# Altium PCB OCP_V1.0.PcbDoc
Units mil, origin at the board's own origin, x right, y up, seen from the top; angles counter-clockwise.
Board outline 1900 x 1460 mil, 2 copper layers (Top Layer, Bottom Layer); 37 components, 20 nets, 119 pads, 81 vias.
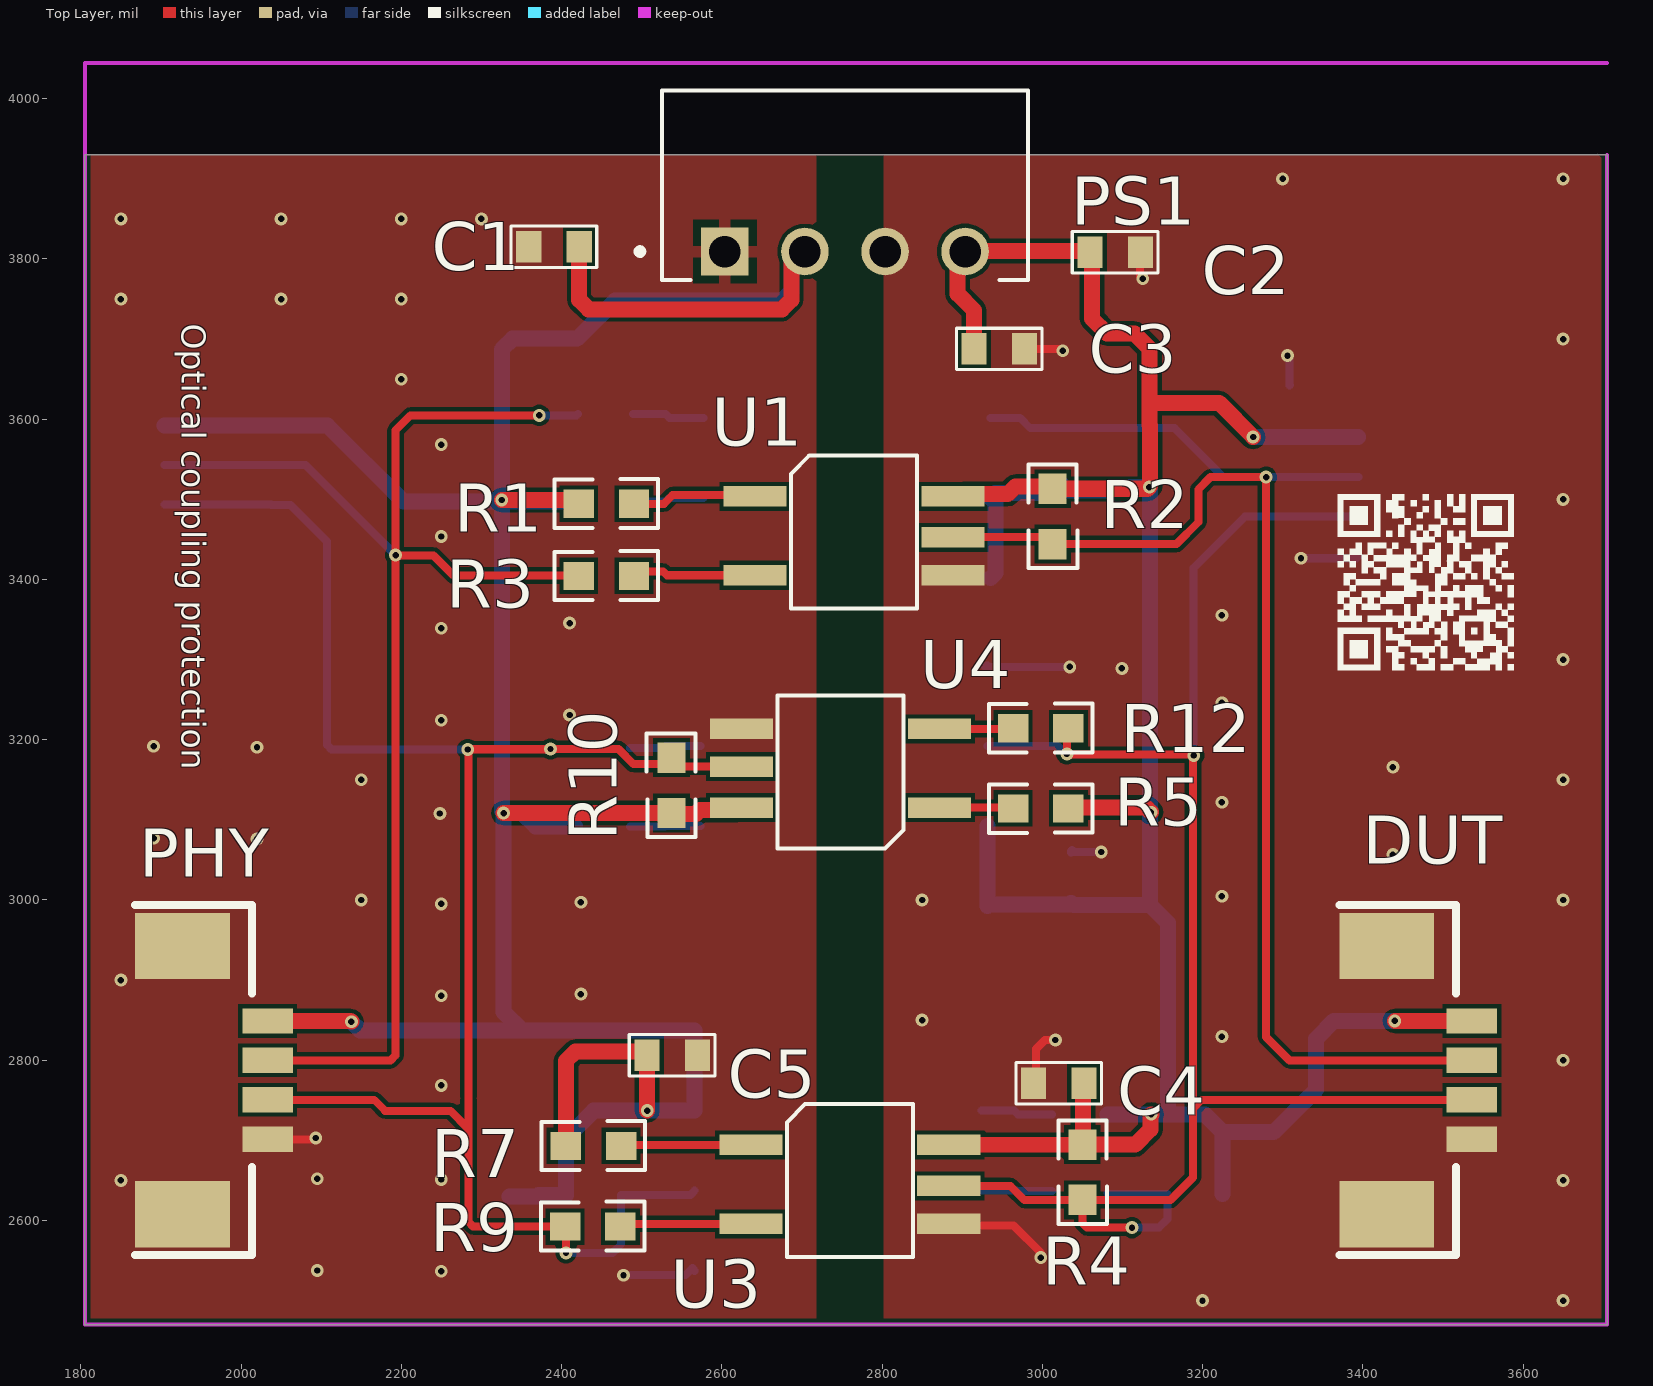
[diagram p0: Top Layer view]
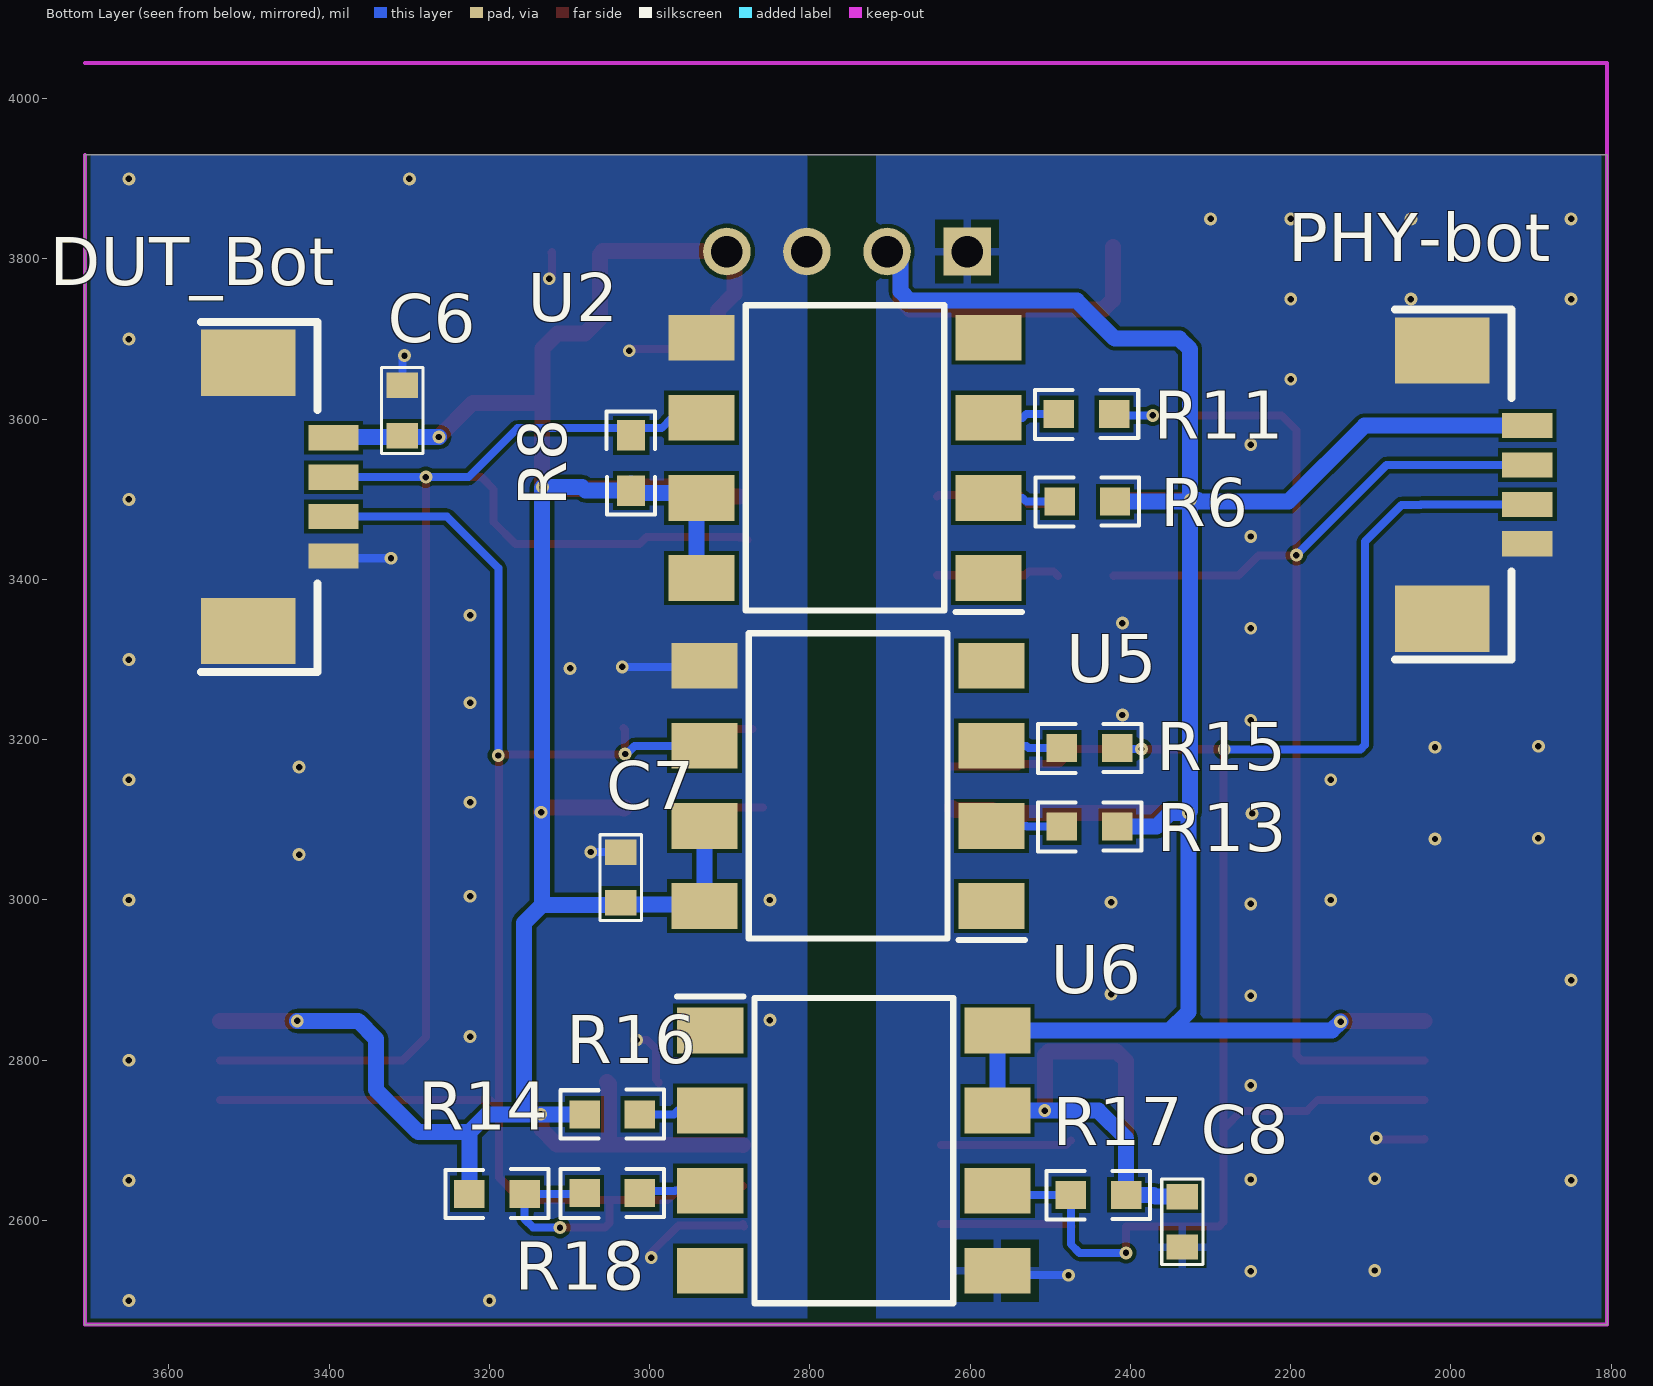
[diagram p1: Bottom Layer view, seen from below]
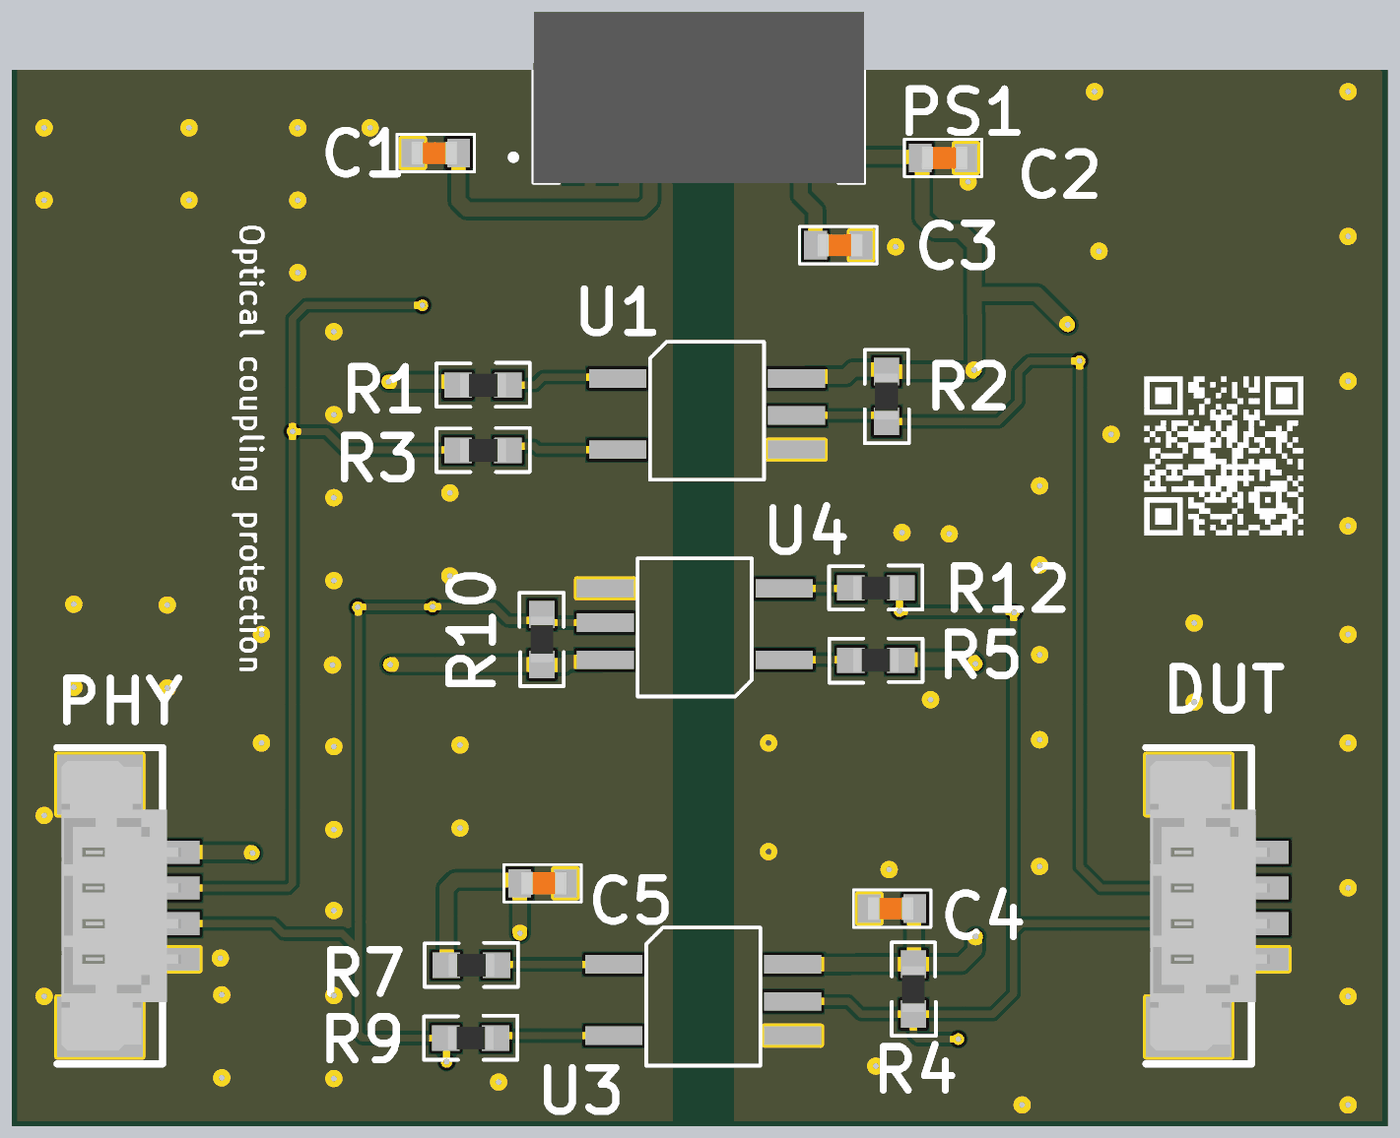
[diagram p2: 3D render of the assembled board from above, using the file's embedded part models]
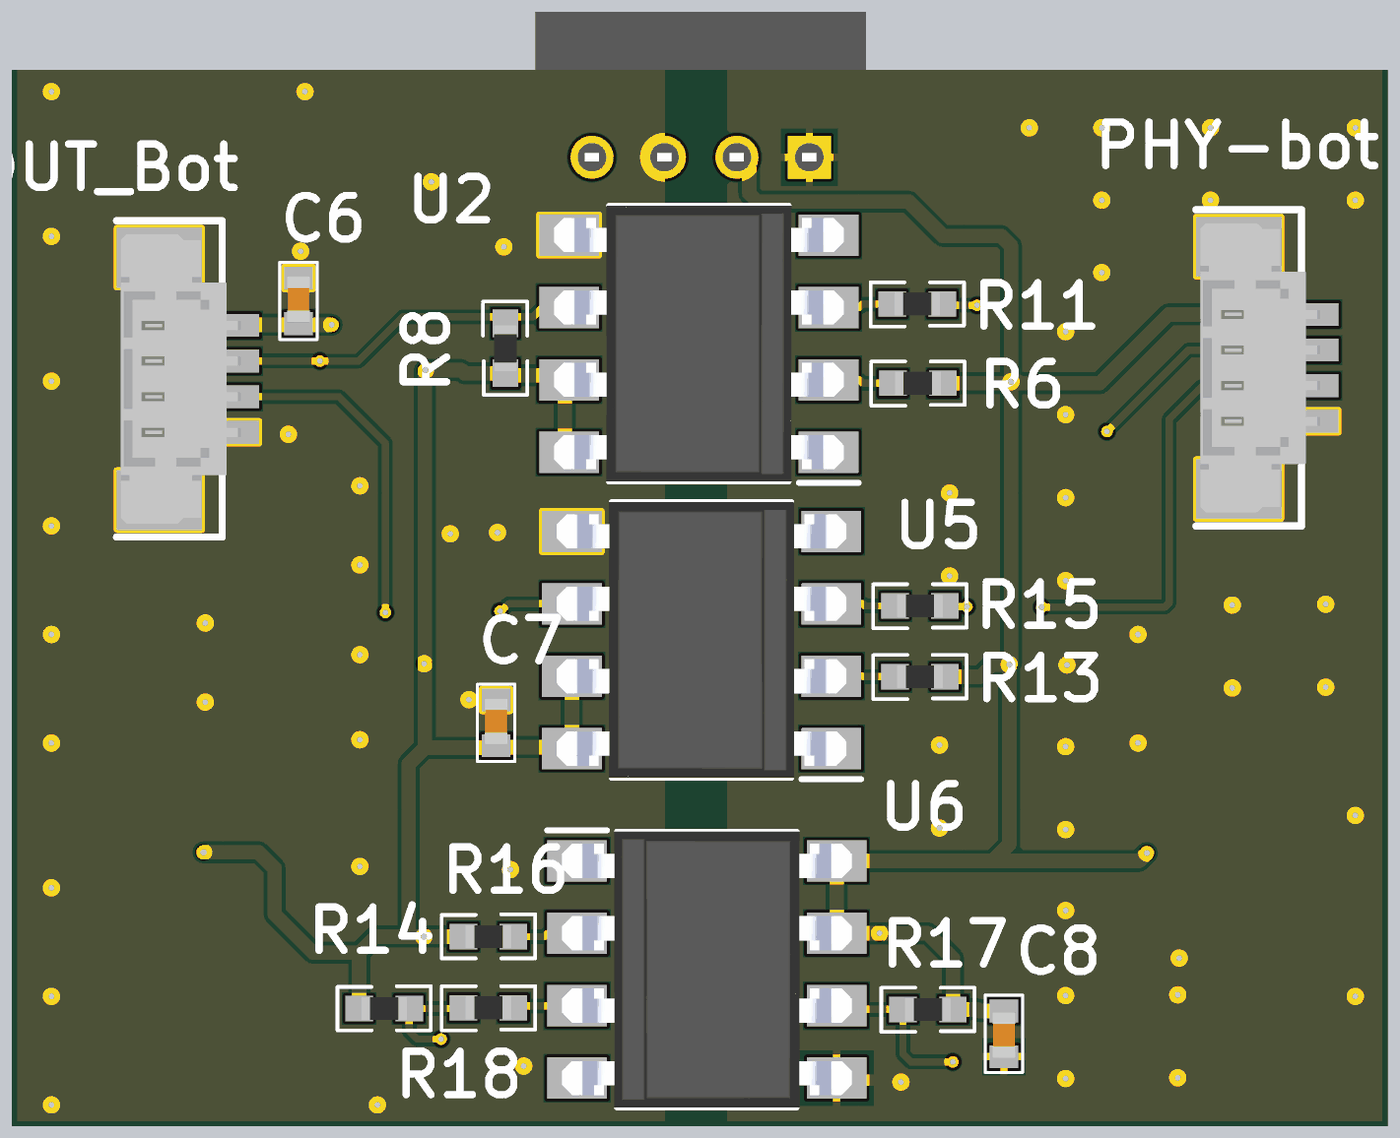
[diagram p3: 3D render of the assembled board from below, using the file's embedded part models]

## Layer stack, top to bottom
Top Solder: solder mask 0.4, Solder Resist, Dk 3.5
Top Layer: signal copper 1.4
Dielectric 1: dielectric 12.6, FR-4, Dk 4.8
Bottom Layer: signal copper 1.4
Bottom Solder: solder mask 0.4, Solder Resist, Dk 3.5

## Board outline
1805,2470 1805,3930 3705,3930 3705,2470

## Design rules (kind name [scope] priority, off if disabled: settings)
Clearance [All] p1: gap=5 ignorepadtopadclearanceinfootprint=FALSE
PlaneConnect [All] p1: planeconnectstyle=Direct reliefexpansion=20 reliefentries=4 reliefconductorwidth=10 reliefairgap=10
PolygonConnect [All] p1: connectstyle=Relief reliefconductorwidth=10 reliefentries=4 polygonreliefangle="90 Angle" airgapwidth=10
RoutingVias [All] p1: holewidth=28 width=50 viastyle="Through Hole" minholewidth=8 minwidth=16 maxholewidth=28 maxwidth=50
SolderMaskExpansion [All] p1: expansion=4 istentingtop=FALSE
SupplyNets "Schematic Supply Nets_3" [InNet('GND_out')] p1: voltage=0.000
SupplyNets "Schematic Supply Nets_2" [InNet('5V_in')] p2: voltage=0.000
SupplyNets "Schematic Supply Nets_1" [InNet('5V_out')] p3: voltage=0.000
SupplyNets "Schematic Supply Nets" [InNet('GND_in')] p4: voltage=0.000
UnRoutedNet [All] p1: checkbadconnections=TRUE
Width [All] p1: maxlimit=20 minlimit=5 preferedwidth=10
28 further rules are at their usual default settings.

## Components (designator, comment, footprint, x,y, rotation, side; value= is the part's Value field where it differs from the comment)
C1 "0.1uF/50V/C0603" C0603 2358.94,3815.17 r0 top value=10uF/50V/C0603
C2 "0.1uF/50V/C0603" C0603 3122.49,3808.36 r180 top value=10uF/50V/C0603
C3 "0.1uF/50V/C0603" C0603 2977.84,3687.74 r180 top
C4 "0.1uF/50V/C0603" C0603 2989,2771.3 r0 top
C5 "0.1uF/50V/C0603" C0603 2569.51,2806.24 r180 top
C6 "0.1uF/50V/C0603" C0603 3308.95,3642.47 r270 bottom
C7 "0.1uF/50V/C0603" C0603 3036.08,3059.47 r270 bottom
C8 "0.1uF/50V/C0603" C0603 2335.15,2566.7 r90 bottom
DUT "CCX-W125-04-SMT" CON1.25MM_4PIN(180) 3483.15,2775.19 r270 top
DUT_Bot "CCX-W125-04-SMT" CON1.25MM_4PIN(180) 3447.83,3503.1 r270 bottom
PHY "CCX-W125-04-SMT" CON1.25MM_4PIN(180) 1980,2775.19 r270 top
PHY-bot "CCX-W125-04-SMT" CON1.25MM_4PIN(180) 1957.72,3518.35 r270 bottom
PS1 "B0505S-1WR3" CONV_B0505S-1WR3 2753.72,3892 r0 top
R1 "3.3K/1%/R0603" R0603 2455.97,3494.49 r180 top
R2 "3.3K/1%/R0603" R0603 3012.8,3478.68 r90 top
R3 "3.3K/1%/R0603" R0603 2455.97,3404.49 r180 top value=100/1%/R0603
R4 "3.3K/1%/R0603" R0603 3050,2660 r90 top
R5 "3.3K/1%/R0603" R0603 2998.11,3114.33 r0 top
R6 "3.3K/1%/R0603" R0603 2453.83,3497.06 r180 bottom
R7 "3.3K/1%/R0603" R0603 2439.78,2693.07 r180 top
R8 "3.3K/1%/R0603" R0603 3023.18,3545.4 r270 bottom
R9 "3.3K/1%/R0603" R0603 2438.89,2592.39 r180 top value=100/1%/R0603
R10 "3.3K/1%/R0603" R0603 2537.2,3143.11 r270 top value=4.7K/1%/R0603
R11 "3.3K/1%/R0603" R0603 2454.79,3606.54 r180 bottom value=100/1%/R0603
R12 "3.3K/1%/R0603" R0603 2998.11,3214.33 r180 top value=100/1%/R0603
R13 "3.3K/1%/R0603" R0603 2451.02,3091.67 r180 bottom
R14 "3.3K/1%/R0603" R0603 3190.62,2633.11 r0 bottom
R15 "3.3K/1%/R0603" R0603 2451.02,3189.45 r180 bottom value=100/1%/R0603
R16 "3.3K/1%/R0603" R0603 3046.62,2732.49 r0 bottom
R17 "3.3K/1%/R0603" R0603 2440,2631.94 r180 bottom value=4.7K/1%/R0603
R18 "3.3K/1%/R0603" R0603 3046.72,2634.11 r180 bottom value=100/1%/R0603
U1 "HCPL-M601" JEDEC_MO-155 2764.94,3454.49 r0 top
U2 "6N137S-TA1" SOP254P1016X460-8N 2756.21,3551.81 r0 bottom
U3 "HCPL-M601" JEDEC_MO-155 2759.87,2645 r0 top
U4 "HCPL-M601" JEDEC_MO-155 2748.11,3164.33 r180 top
U5 "6N137S-TA1" SOP254P1016X460-8N 2752.44,3142.36 r0 bottom
U6 "6N137S-TA1" SOP254P1016X460-8N 2745.2,2687.12 r180 bottom

## Footprints (in the part's own frame and the unit in brackets; to place one, negate y for a bottom-side part, rotate by r counter-clockwise, add the part's x,y. Pads: shape width x height; smd on the part's side, far side on the other; paste and mask are expansions set on the pad)
C0603 [mm]
  rect 0.8x1 smd: 1(0,0) 2(1.6,0)
  silkscreen extent -0.56,-0.66 2.16,0.66, body extent -0.05,-0.4 1.55,0.4, height 0.5
CON1.25MM_4PIN(180) [mm]
  rect 2.1x3 smd: 0(-4.25,-1.35) 0(4.25,-1.35)
  rect 0.8x1.6 smd: 1(-1.875,1.35) 2(-0.625,1.35) 3(0.625,1.35) 4(1.875,1.35)
  silkscreen extent -5.55,-2.85 5.55,0.85, body extent -5.07,-2.7 5.07,1.5, height 4.67
CONV_B0505S-1WR3 [mm]
  rect 1.508x1.508 / inner round 1.508 / far side rect 1.508x1.508 hole 1: 1(-3.81,-2.1)
  round 1.508 hole 1: 2(-1.27,-2.1) 3(1.27,-2.1) 4(3.81,-2.1)
  silkscreen extent -6.6,-3 5.8,3, body extent -5.8,-3 5.8,3, height 10.16
JEDEC_MO-155 [mm]
  rect 2x0.65 smd: 1(-3.135,1.25) 3(-3.135,-1.25) 4(3.135,-1.25) 5(3.135,-0.05) 6(3.135,1.25)
  silkscreen extent -2,-2.31 2,2.54
R0603 [mil]
  rect 38x35 smd: 1(-34.45,0) 2(34.55,0)
  silkscreen extent -64,-31 65,30, body extent -31,-16 31,16, height 18
SOP254P1016X460-8N [mm]
  rect 2.1x1.45 smd: 1(-4.55,3.81) 2(-4.55,1.27) 3(-4.55,-1.27) 4(-4.55,-3.81) 5(4.55,-3.81) 6(4.55,-1.27) 7(4.55,1.27) 8(4.55,3.81)
  silkscreen extent -5.6,-4.84 3.15,4.89, body extent -5.08,-4.84 5.08,4.84, height 4.6

## Part data
C1 C2 C3 C4 C5 C6 C7 C8: library part "C0603 0.1uF 100V", "MLCC 0603 0.1uF 50V 10% X7R", ETIPN1=ME2C1-30104K7-00, ETIPN1_Des="MLCC 0603 0.1uF 50V 10% X7R", No="01 MLCC"
DUT DUT_Bot PHY PHY-bot: library part "Pitch 1.25 mm/ 180° / 4 pin", ETIPN1=MM203-04022-0006, ETIPN1_Des=CCX-W125-04-SMT
PS1: "Isolated Module DC DC Converter 1 Output 5V - - - 200mA 4.5V - 5.5V Input", Package="SIP-4-4 MORNSUN", Availability="In Stock", Check_prices=https://www.snapeda.com/parts/B0505S-1WR3/MORNSUN/view-part/?ref=eda, MF="Mornsun America, LLC", MP=B0505S-1WR3, Price=None, Purchase-URL=https://pricing.snapeda.com/search/part/B0505S-1WR3/?ref=eda, SnapEDA_Link=https://www.snapeda.com/parts/B0505S-1WR3/MORNSUN/view-part/?ref=snap
R1 R2 R3 R4 R5 R6 R7 R8 R9 R10 R11 R12 R13 R14 R15 R16 R17 R18: library part "R0603 3.3k 1% 1/10w", "Res 0603 3.3K 1% 1/10w", ETIPN1=ME2R1-303K3F2-00, ETIPN1_Des="Res 0603 3.3K 1% 1/10w", No="02 Res"
U1 U3 U4: "Small Outline, 5 Lead, High CMR, / High Speed, Logic Gate Optocouplers"
U2 U5 U6: "Small Outline, 8 Lead, High CMR, / High Speed, Logic Gate Optocouplers"

## Via types
v1: diameter 16, hole 8, Top Layer to Bottom Layer, 81 vias

## Nets (pads, with @x,y where several pads share a name; then routed paths per layer and width w, separated by ;. In a path a pad name is that pad's centre, name@x,y a point inside that pad or via, vN(x,y) a via of type N, cw(c..) or ccw(c..) an arc to the next point about the centre after c; other vN are vias at no path point)
5V_in: C1.2 C5.2 C8.2 PHY-bot.1 PHY.1 PS1.2 R1.2 R6.2 R7.2 R10.2 R13.2 R17.2 U4.6 U6.7 U6.8 | length 3982.7
  Top Layer w10: U4.6@2622.48,3114.99 2622.61,3115.12 U4.6
  Top Layer w20: PHY.1 2136.66,2849.01 v1(2137.67,2848) ; v1(2325.38,3499.16) 2416.75,3499.16 R1.2 ; v1(2327.69,3108.44) 2327.81,3108.56 R10.2 ; R7.2@2405.45,2700 2405.45,2799 2417.16,2810.71 2502.04,2810.71 C5.2 2506.51,2737.49 v1(2506.88,2737.12) ; C1.2 2421.93,3748.91 2433.65,3737.19 2674.97,3737.19 2686.68,3748.91 PS1.2@2686.68,3809.81 ; R10.2@2538.81,3099.93 2546.31,3107.43 2567.63,3107.43 2572.51,3112.32 2619.81,3112.32 U4.6@2622.48,3114.99
  Bottom Layer w20: PHY-bot.1 2107.84,3592.16 2202.94,3497.06 2313.31,3497.06 2315.4,3499.16 v1(2325.38,3499.16) ; v1(2137.67,2848) 2148.55,2837.12 2350.66,2837.12 ; v1@2327.47,3497.06 R6.2 ; C8.2 2369,2629.7 2371.24,2631.94 R17.2 2405.45,2702.57 2440,2737.12 v1(2506.88,2737.12) U6.7 U6.8 2350.66,2837.12 ; R13.2 2367.47,3091.67 2350.7,3108.44 v1(2327.69,3108.44) ; PS1.2@2686.68,3809.81 2686.68,3759.46 2675.29,3748.07 2466.76,3748.07 2419.27,3700.58 2338.88,3700.58 2325.38,3687.08 v1(2325.38,3499.16) ; v1(2325.38,3499.16) 2325.38,3110.75 v1(2327.69,3108.44) ; v1(2327.69,3108.44) 2327.69,2860.09 2350.66,2837.12
5V_out: C2.2 C3.2 C4.2 C6.2 C7.2 DUT.1 DUT_Bot.1 PS1.4 R2.2 R4.2 R5.2 R8.2 R14.2 R16.2 U1.6 U2.7 U2.8 U3.6 U5.7 U5.8 | length 3701
  Top Layer w20: U3.6 R4.2@3045.55,2694.55 ; U1.6 2897.81,3503.7 2900.55,3506.44 2956.8,3506.44 2966.57,3516.22 3009.82,3516.22 R2.2 3131.55,3513.23 3134.7,3516.38 3134.7,3592.33 3134.09,3592.94 3134.09,3688.15 3115.04,3707.2 3080.51,3707.2 3062.05,3725.66 3062.05,3805.82 C2.2 ; C3.2 2914.85,3735.73 2894.22,3756.36 2894.22,3802.28 2886.68,3809.81 C2.2@3058.85,3809.81 ; R5.2 3031.76,3114.33 3030.64,3115.46 3129.61,3115.46 v1(3135.51,3109.55) ; C4.2@3053.53,2772.84 3051,2770.31 3051,2700 R4.2@3045.55,2694.55 ; 3134.7,3620.37 3220.59,3620.37 v1(3263.13,3577.83) ; v1(3136,2732.49) 3134.85,2731.34 3134.85,2713.5 3115.91,2694.55 R4.2 R4.2@3045.55,2694.55 ; v1(3440,2849.01) DUT.1
  Bottom Layer w20: U5.7 U5.8 2933.63,2994.42 3034.02,2994.42 C7.2 3039.06,2993.5 3134.65,2993.5 ; U2.8 2941.44,3407.91 U2.7@2941.44,3507.91 ; U2.7 U2.7@2941.44,3507.91 ; R8.2 R8.2@3030.67,3510.85 ; R8.2@3023.18,3519.83 3011.26,3507.91 U2.7@2941.44,3507.91 ; R8.2@3030.68,3510.87 3079.93,3510.87 3084.4,3515.33 v1(3133.65,3515.33) 3134.65,3514.34 3134.65,2993.5 ; R16.2 v1(3136,2732.49) 3156.73,2732.49 ; R14.2 3225.17,2710.18 ; v1(3263.13,3577.83) DUT_Bot.1@3393.76,3577.83 ; v1(3440,2849.01) 3364.01,2849.01 3341.69,2826.7 3341.69,2763.28 3288.59,2710.18 3225.17,2710.18 ; 3134.65,2993.5 3156.73,2971.42 3156.73,2732.49 ; 3156.73,2732.49 3202.86,2732.49 3225.17,2710.18
GND_in: C1.1 C5.1 C8.1 PHY-bot.0 PHY-bot.4 PHY.0 PHY.4 PS1.1 U4.4 U6.5 | length 155
  Top Layer w10: PHY.4 2033.58,2700.95 2089.61,2700.95 2091.54,2702.87 v1(2093.16,2702.87)
  Bottom Layer w10: v1(2477.28,2531.63) 2554.68,2531.63 2563.39,2540.34 2566.07,2537.66 U6.5
  other v1: 2249.91,2536.47 2095.12,2537.48 1850,2650 2249.91,2651.12 2095.12,2652.13 2249.91,2768.59 2249.91,2880.42 2424.06,2882.55 1850,2900 2249.91,2995.07 2424.06,2997.2 2150,3000 2019.87,3076.03 1890.87,3077.11 2248.07,3107.88 2150,3150 2019.87,3190.68 1890.87,3191.76 2249.91,3224.38 2410.09,3230.83 2249.91,3339.03 2410.09,3345.49 2249.91,3453.68 2249.91,3568.33 2200,3650 1850,3750 2050,3750 2200,3750 1850,3850 2050,3850 2200,3850 2300,3850
GND_out: C2.1 C3.1 C4.1 C6.1 C7.1 DUT.0 DUT.4 DUT_Bot.0 DUT_Bot.4 PS1.3 U1.4 U2.5 U3.4 U5.5 | length 561.7
  Top Layer w10: U3.4@2882.07,2592.3 2883.51,2593.74 2964.22,2593.74 2998.04,2559.91 v1(2998.04,2553.65) ; U3.4@2883.29,2593.52 U3.4 ; C3.1 3023.32,3687.74 v1(3025.52,3685.55) ; C4.1 2989,2772.43 2988.87,2772.56 2992.25,2775.94 2992.25,2814.12 3003.37,2825.24 v1(3016.42,2825.24) ; C2.1 3122.38,3808.36 3121.96,3808.78 3121.96,3778.78 v1(3125.43,3775.31)
  Bottom Layer w10: U5.5 2927.45,3292.36 2928.92,3290.9 v1(3034.18,3290.9) ; C7.1 3036.08,3061.37 3036.95,3062.24 3039.32,3059.88 v1(3073.62,3059.88) ; v1(3306.1,3679.49) 3308.4,3677.19 3308.4,3641.97 C6.1 ; v1(3322.91,3426.5) 3392.38,3426.5 3395.16,3429.28 DUT_Bot.4
  other v1: 3200,2500 3650,2500 3650,2650 3650,2800 3224.21,2829.51 2850,2850 2850,3000 3650,3000 3224.21,3004.52 3437.63,3056.55 3224.21,3122.06 3650,3150 3437.63,3165.81 3224.21,3246.05 3099.41,3289.05 3650,3300 3224.21,3355.32 3650,3500 3650,3700 3300,3900 3650,3900
NetR1_1: R1.1 U1.1 | length 156.4
  Top Layer w10: R1.1 2527.69,3494.49 2538.73,3505.54 2639.68,3505.54 U1.1
NetR3_1: R3.1 U1.3 | length 155.5
  Top Layer w10: R3.1 2496.14,3410.22 2526.5,3410.22 2531.44,3405.28 U1.3
NetR5_1: R5.1 U4.1 | length 117.8
  Top Layer w10: U4.1@2858.75,3115.46 U4.1@2859.1,3115.12 ; U4.1 U4.1@2859.1,3115.12 ; R5.1 2962.88,3115.12 U4.1@2859.1,3115.12
NetR6_1: R6.1 U2.2 | length 90.8
  Bottom Layer w10: R6.1 2530,3497.06 2534.75,3501.81 U2.2
NetR7_1: R7.1 U3.1 | length 164.4
  Top Layer w10: R7.1@2474.45,2700 2480.24,2694.21 U3.1
NetR9_1: R9.1 U3.3 | length 164.5
  Top Layer w10: R9.1 2476.74,2595.79 U3.3
NetR11_1: R11.1 U2.3 | length 89.8
  Bottom Layer w10: R11.1 2530,3606.54 2534.73,3601.81 U2.3
NetR12_2: R12.2 U4.3 | length 92.4
  Top Layer w10: U4.3 2962.77,3213.54 R12.2
NetR13_1: R13.1 U5.2 | length 88.1
  Bottom Layer w10: R13.1 2529,3091.67 2529.69,3092.36 U5.2
NetR15_1: R15.1 U5.3 | length 89
  Bottom Layer w10: R15.1 2527,3189.45 2529.91,3192.36 U5.3
NetR16_1: R16.1 U6.2 | length 89.8
  Bottom Layer w10: U6.2 2965,2737.12 2969.63,2732.49 R16.1
NetR18_2: R18.2 U6.3 | length 88
  Bottom Layer w10: U6.3 2968,2637.12 2968.38,2636.74 R18.2@3012.17,2636.74
RX/SDA_in: PHY-bot.3 PHY.3 R9.2 R10.1 R15.2 R17.1 U4.5 U6.6 | length 2272.3
  Top Layer w10: PHY.3 2166.19,2750.59 2179.9,2736.88 2261.19,2736.88 2283.76,2714.3 ; 2283.76,2750.59 2283.76,2714.3 ; 2283.76,2754.13 2283.76,3186.95 v1(2282.89,3187.83) 2283.16,3188.11 2385.95,3188.11 v1(2386.23,3188.38) 2470.86,3188.38 2489.86,3169.39 2536.97,3169.39 2540.06,3166.3 U4.5 ; R9.2 2289.62,2592.39 2283.76,2598.25 2283.76,2714.3 ; v1(2405.57,2559.45) R9.2@2405.57,2592.39
  Bottom Layer w10: PHY-bot.3 2037.26,3493.74 2038,3493 2061.57,3493 2107.1,3447.46 2107.1,3193.69 2112.96,3187.83 v1(2282.89,3187.83) ; v1(2386.23,3188.38) 2415.4,3188.38 R15.2 ; v1(2405.57,2559.45) 2463.57,2559.45 2474.45,2570.33 R17.1 2560.89,2631.94 U6.6
RX/SDA_out: DUT.3 DUT_Bot.3 R4.1 R12.1 R14.1 R18.1 U3.5 U5.6 | length 2213.6
  Top Layer w10: U3.5 2960.05,2643.03 2977.53,2625.55 R4.1 ; R12.1 3030.68,3212.45 v1(3030.68,3182.19) 3031.61,3181.26 3188,3181.26 v1(3188.92,3180.33) 3188,3179.4 3188,2739.53 ; v1(3112,2591) 3055.86,2591 3050,2596.86 R4.1 ; DUT.3 3199.06,2750.59 3188,2739.53 ; R4.1 3160,2625.55 3188,2653.55 3188,2739.53
  Bottom Layer w10: U5.6@2931.6,3192.34 3018.9,3192.34 3029.06,3182.19 v1(3030.68,3182.19) ; R18.1 3082.17,2633.11 R14.1 3156.17,2601.79 3145.38,2591 v1(3112,2591) ; v1(3188.92,3180.33) 3188.92,3414.16 3253.25,3478.49 DUT_Bot.3
TX/CLK_in: PHY-bot.2 PHY.2 R3.2 R11.2 | length 1752.4
  Top Layer w10: PHY.2 2186.49,2799.8 2192.83,2806.14 2192.83,3120.38 v1(2192.83,3430.46) ; v1(2372.13,3604.86) 2211.44,3604.86 2192.83,3586.25 v1(2192.83,3430.46) ; R3.2 2420.91,3405 2265.18,3405 2240.07,3430.11 2193.18,3430.11 v1(2192.83,3430.46)
  Bottom Layer w10: PHY-bot.2 2080.33,3542.95 v1(2192.83,3430.46) ; v1(2372.13,3604.86) 2418.55,3604.86 R11.2
TX/CLK_out: DUT.2 DUT_Bot.2 R2.1 R8.1 U1.5 U2.6 | length 1930.8
  Top Layer w10: U1.5@2877.74,3449.55 2881.09,3452.9 3004.14,3452.9 R2.1 3167.51,3444.23 3194.76,3471.48 3194.76,3512.48 3210.08,3527.8 v1(3279.36,3527.8) 3279.36,2829.07 3308.62,2799.8 DUT.2 ; U1.5@2880.71,3452.52 U1.5
  Bottom Layer w10: U2.6 2972,3601.81 2984.98,3588.83 3165,3588.83 3226.13,3527.7 3279.26,3527.7 v1(3279.36,3527.8) 3394.58,3527.8 DUT_Bot.2
pads on no net: U2.1 U2.4 U5.1 U5.4 U6.1 U6.4

## Polygon pours and split planes (outlines as drawn)
GND_out on Bottom Layer "GND_Out_B" (solid, pour order 0): 3705,3930 2803.09,3930 2803.09,2470 3715,2470
GND_in on Bottom Layer "GND_IN_B" (solid, pour order 3): 2717.24,3930 1810,3930 1810,2470 2717.24,2470
GND_in on Top Layer "GND_IN_T" (solid, pour order 2): 2717.95,3930.15 1803.9,3930.15 1803.9,2470 2717.95,2470
GND_out on Top Layer "GND_Out_T" (solid, pour order 1): 2801.99,3930.04 3700.79,3931.57 3700.79,2477.58 2801.99,2477.6

## Keep-outs
Keep-Out Layer:
  lines w5: 3705,3930 3705,2470 1805,2470 1805,4044.8 3705,4044.8

## Silkscreen, mask and mechanical layers (free items; w line width, h text height)
Top Overlay:
  drawing of 51 lines, arcs and shapes, not listed
  text "Optical coupling protection" at 1926,3719 h30 r270
Board:
  lines w5: 1805.11,4044.8 3704.7,4044.8 ; 1805.29,3929.88 1805.11,3929.7 1805.11,3891.27 1804.99,3891.15 1804.99,2470.02 1805.04,2470.06 1814.68,2470.06 ; 3704.7,3929.7 3704.98,3929.98 3704.98,2470.03 ; 1814.71,2470.03 3704.98,2470.03 ; 1814.68,2470.06 1814.71,2470.03 ; 3704.98,2470.03 3704.97,2470.02 3704.98,2470.03

## Dimensions
1803.9,2470 to 1805.11,4044.8 on Board
1803.9,3930.15 to 3700.79,3931.57 on Board